# Altium PCB AuxPDU_PatricksDesign.PcbDoc
Units mm, origin at the board's own origin, x right, y up, seen from the top; angles counter-clockwise.
Board outline 80 x 100 mm, 4 copper layers (Top Layer, Layer 1, Layer 2, Bottom Layer), stack 0.602 mm thick; 60 components, 27 nets, 166 pads, 228 vias.
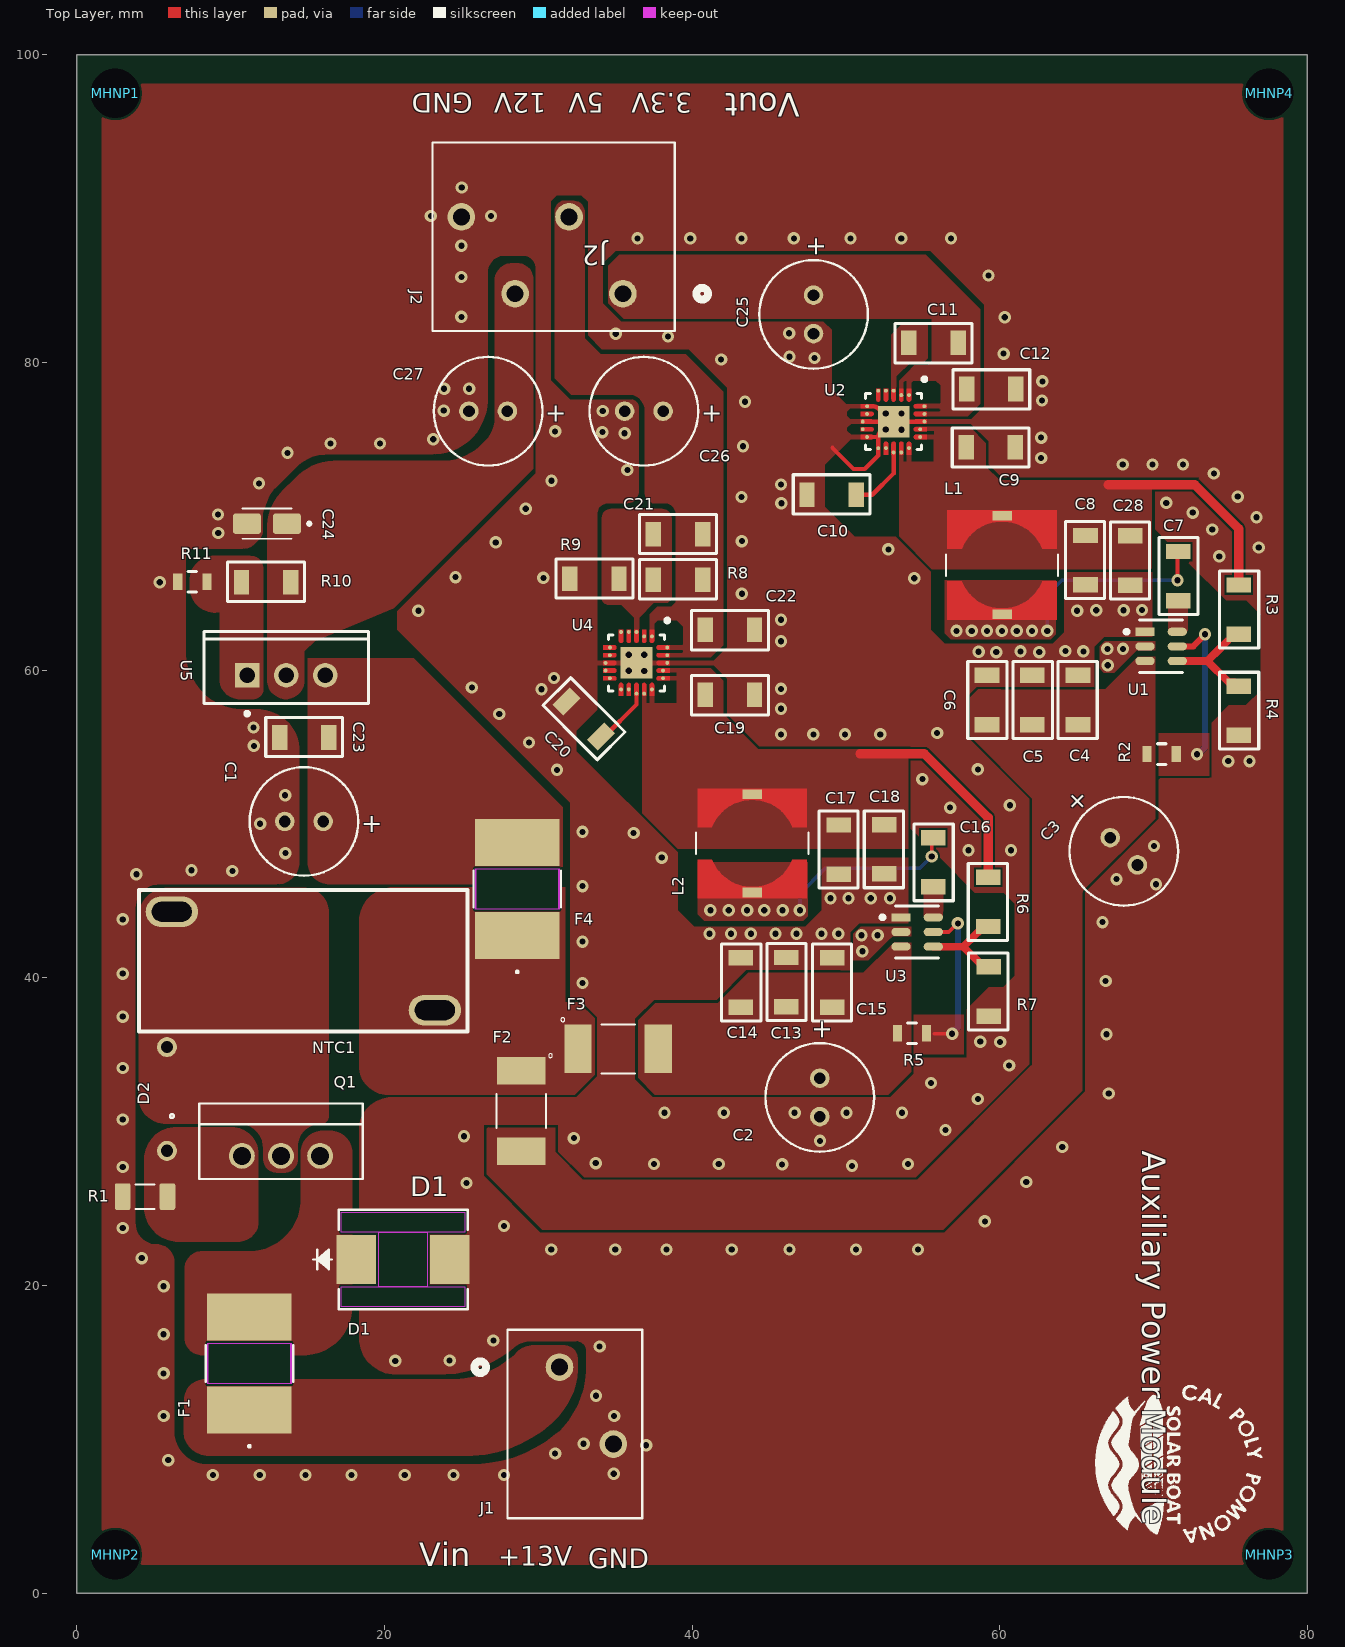
[diagram p0: Top Layer view]
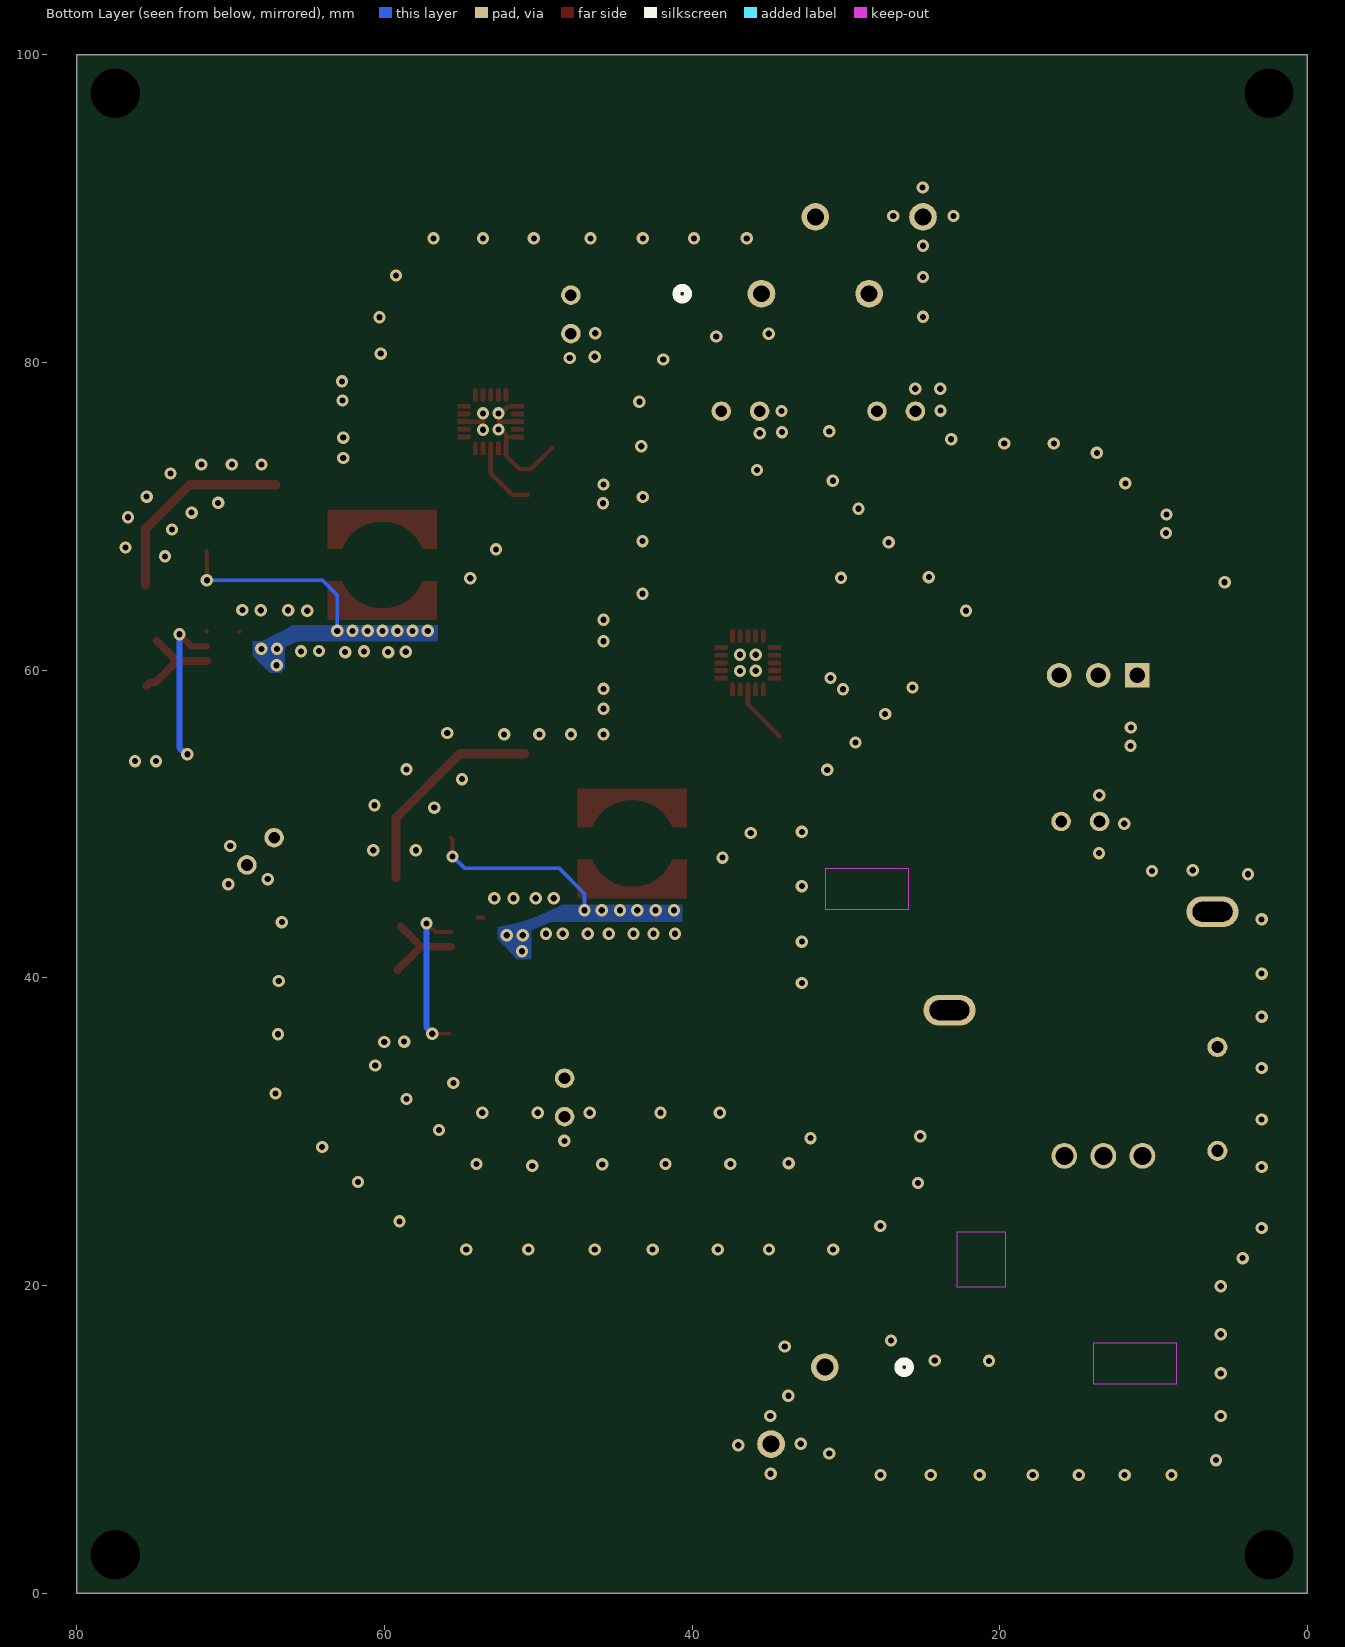
[diagram p1: Bottom Layer view, seen from below]
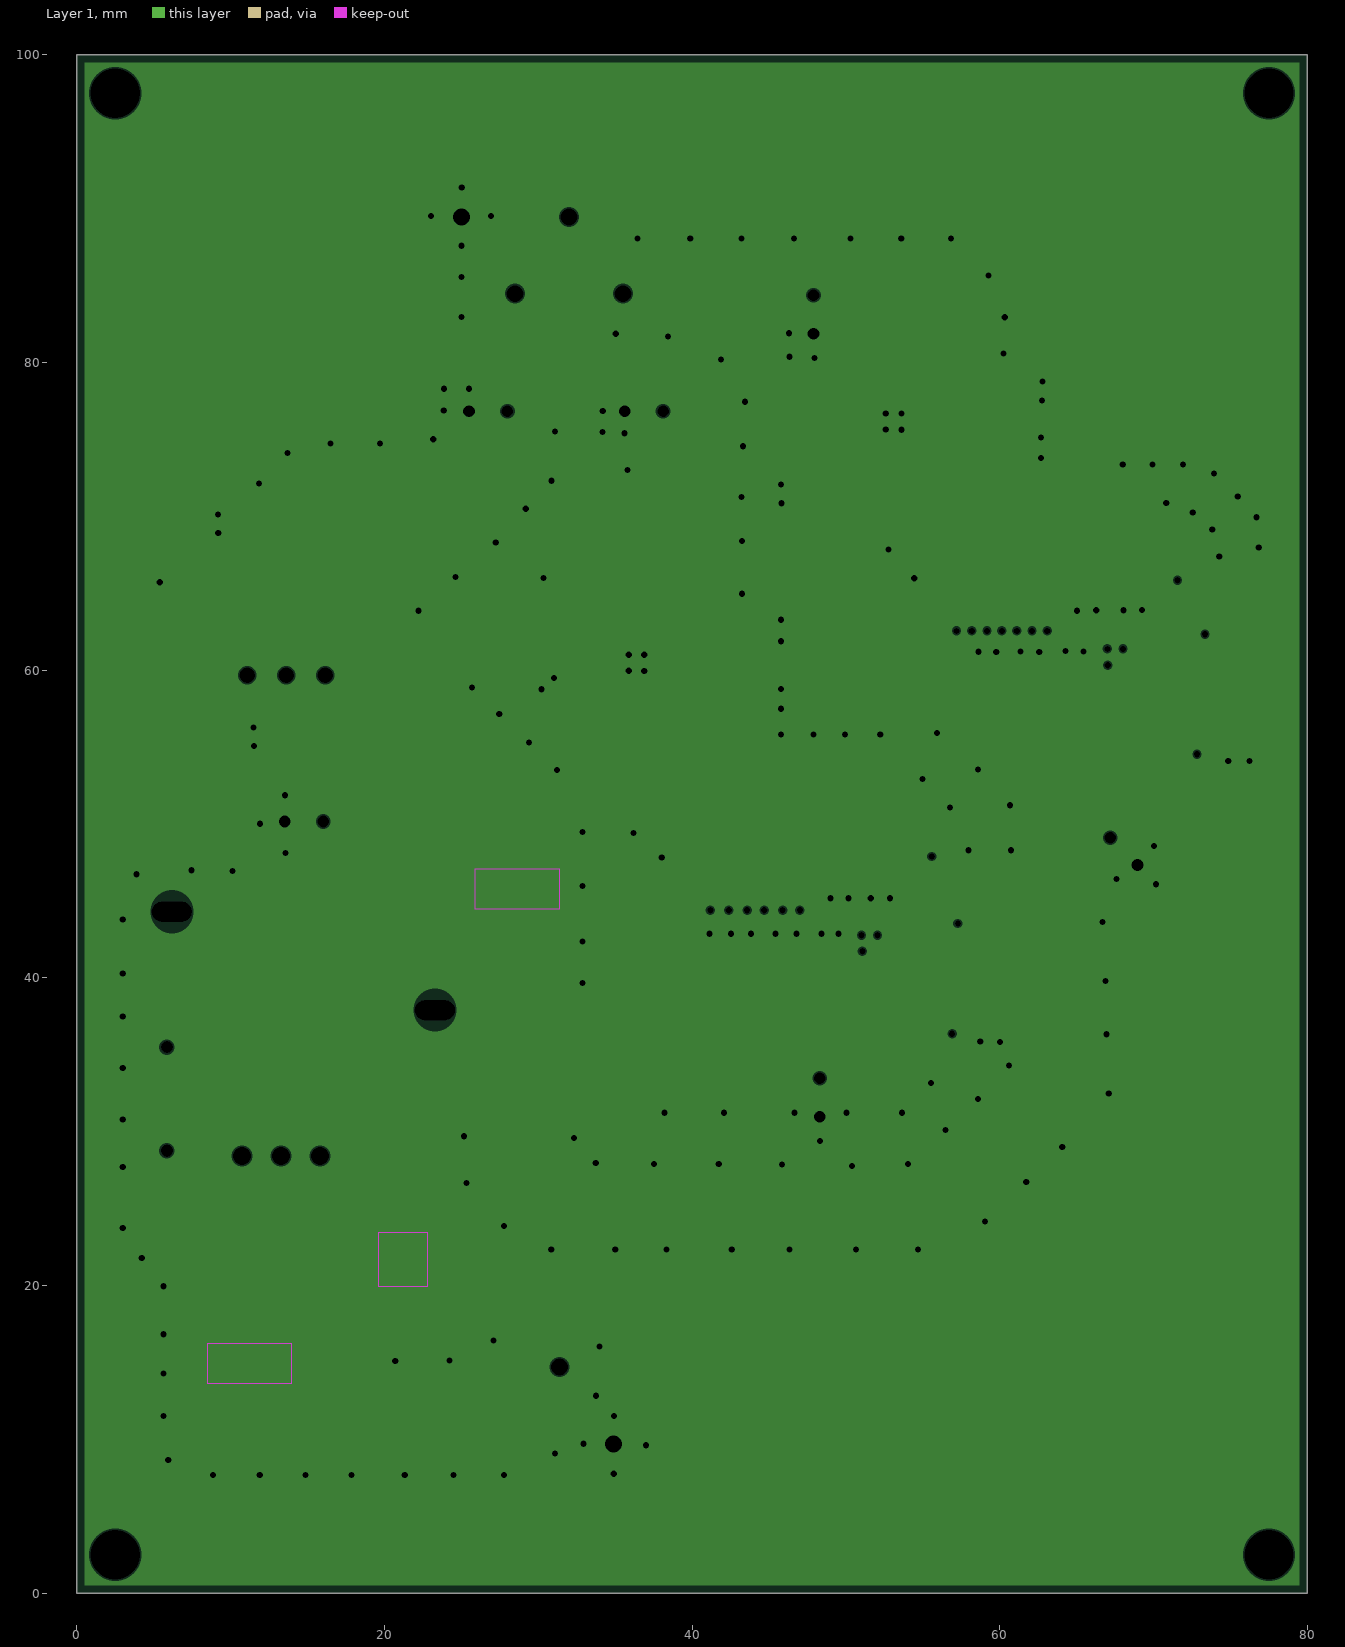
[diagram p2: Layer 1, clearances drawn from the general rule]
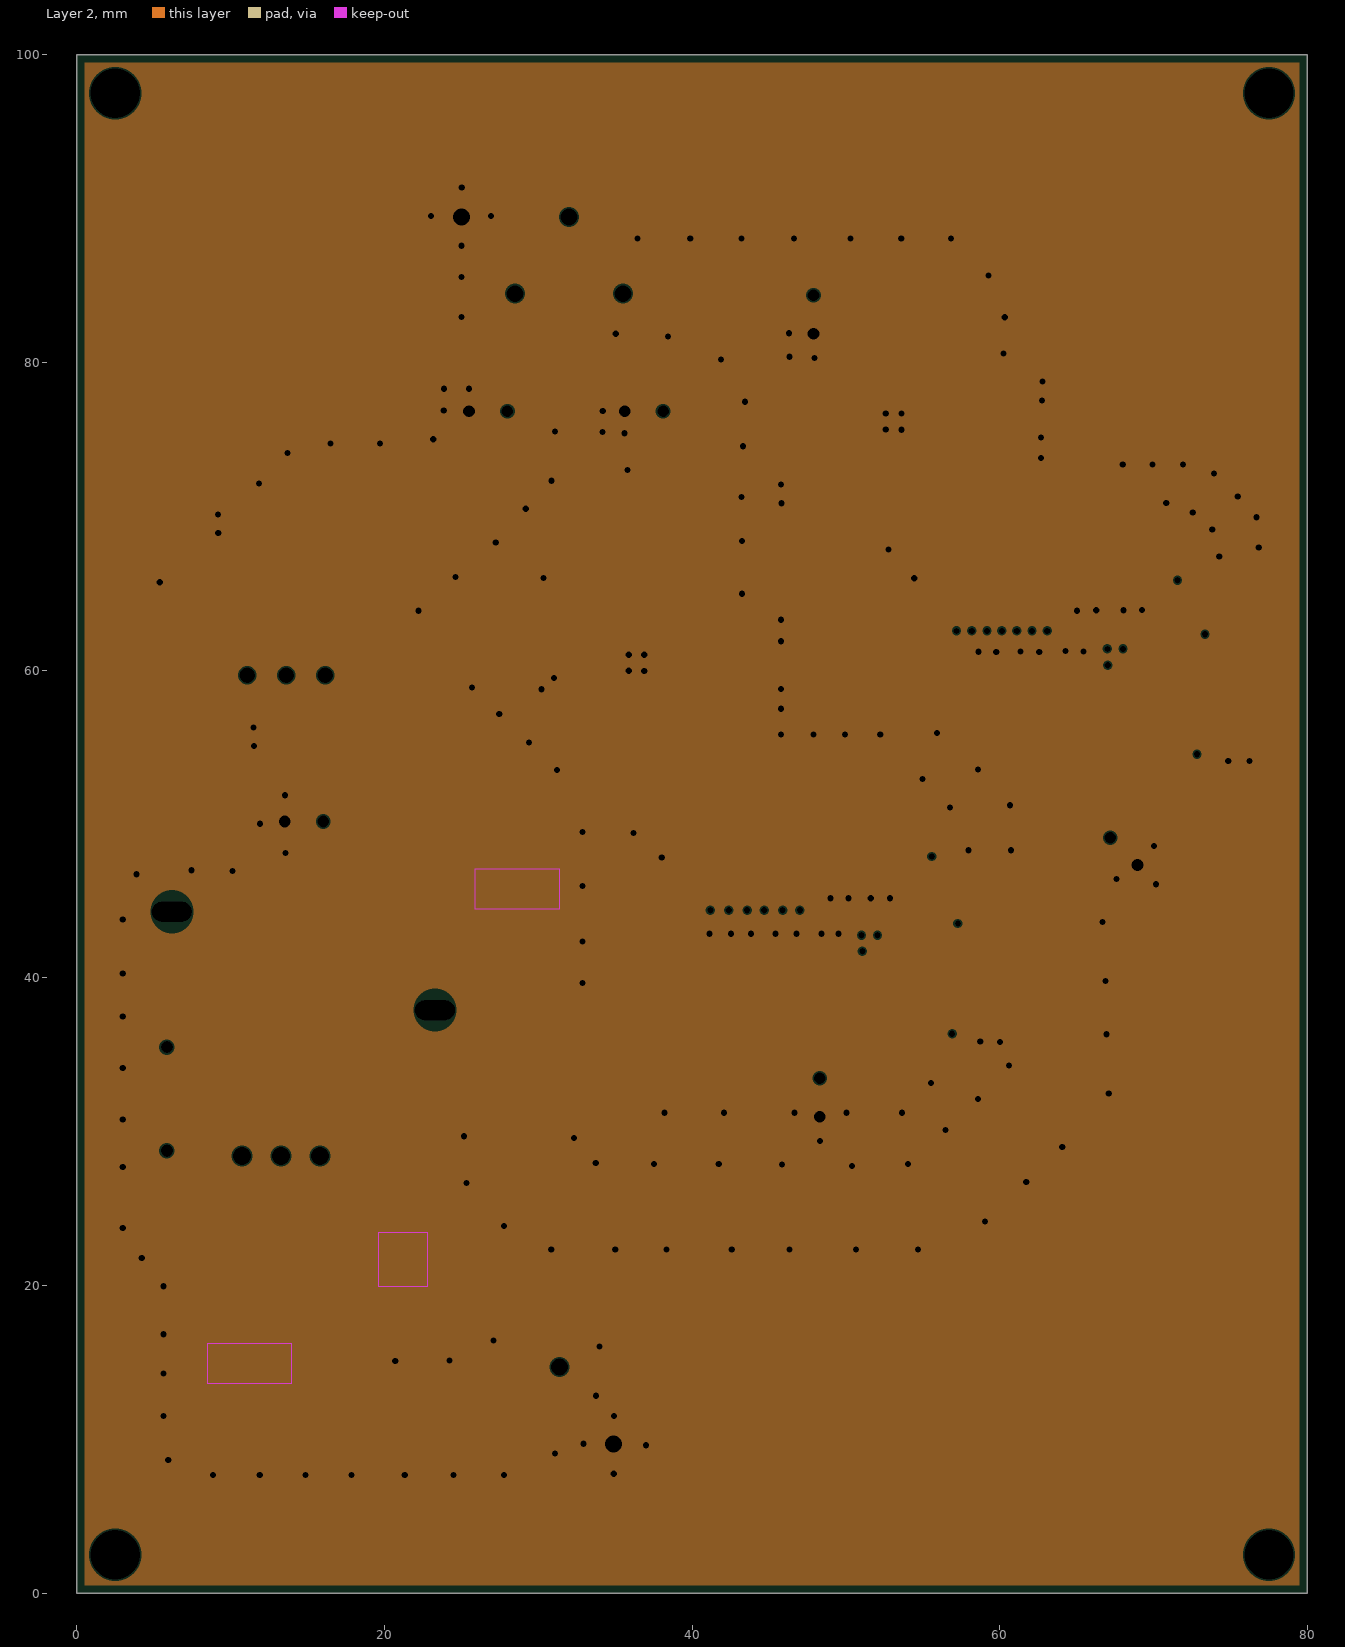
[diagram p3: Layer 2, clearances drawn from the general rule]

## Layer stack, top to bottom
Top Solder: solder mask 0.0102, Solder Resist, Dk 3.5
Top Layer: signal copper 0.035
Dielectric 2: prepreg 0.0711, PP-006, Dk 4.1
Layer 1: plane copper 0.035, net GND
Dielectric 1: dielectric 0.32, FR-4, Dk 4.8
Layer 2: plane copper 0.035, net GND
Dielectric 3: prepreg 0.0711, PP-006, Dk 4.1
Bottom Layer: signal copper 0.035
Bottom Solder: solder mask 0.0102, Solder Resist, Dk 3.5

## Board outline
0,0 0,100 80,100 80,0

## Design rules (kind name [scope] priority, off if disabled: settings)
BoardOutlineClearance [All] p1: gap=0.2 ignorepadtopadclearanceinfootprint=FALSE
Clearance [All] p1: gap=0.152 ignorepadtopadclearanceinfootprint=FALSE
ComponentClearance [All] p1: gap=0.102 collisioncheckmode=3 verticalgap=0.102 showdistances=TRUE
DiffPairsRouting [All] p1: maxlimit=0.102 minlimit=0.102 mostfreqgap=0.102 toplayer_minwidth=0.102 toplayer_maxwidth=1816.048 toplayer_prefwidth=0.102 bottomlayer_minwidth=0.102 bottomlayer_maxwidth=1816.048 bottomlayer_prefwidth=0.102 maxuncoupledlength=12.7
Height [All] p1: minheight=0 maxheight=1816.048 prefheight=12.7
HoleSize [All] p1: absolutevalues=TRUE maxlimit=6.3 minlimit=0.2 maxpercent=80.000 minpercent=20.000
HoleToHoleClearance [All] p1: gap=0.25 allowstackedmicrovias=FALSE
MinimumAnnularRing [All] p1: minimumring=0.076
MinimumSolderMaskSliver [All] p1: minsoldermaskwidth=0
PlaneClearance [All] p1: clearance=0.102
PlaneConnect PlaneConnectPowerPads [InPadClass('PowerPads')] p1: planeconnectstyle=Direct reliefexpansion=0.508 reliefentries=4 reliefconductorwidth=0.254 reliefairgap=0.254
PlaneConnect [All] p2: pad.planeconnectstyle=Relief pad.reliefexpansion=0.3 pad.reliefentries=4 pad.reliefconductorwidth=0.102 pad.reliefairgap=0.102 via.planeconnectstyle=Direct via.reliefexpansion=0.3 via.reliefentries=4 via.reliefconductorwidth=0.127 via.reliefairgap=0.127
PolygonConnect PolygonConnectPowerPads [All vs (InPadClass('PowerPads'))] p1: connectstyle=Direct reliefconductorwidth=0.254 reliefentries=4 polygonreliefangle="90 Angle" airgapwidth=0.254
PolygonConnect [All] p2: connectstyle=Direct reliefconductorwidth=0.102 reliefentries=4 polygonreliefangle="90 Angle" airgapwidth=0.102
RoutingVias [All] p1: holewidth=0.2 width=0.45 viastyle="Through Hole" minholewidth=0.2 minwidth=0.45 maxholewidth=6.3 maxwidth=6.55
SilkToSilkClearance [All] p1: silktosilkclearance=0
SilkToSolderMaskClearance [IsPad] p1: minsilkscreentomaskgap=0.102 clearancetoexposedcopper=TRUE
SolderMaskExpansion [All] p1: expansion=0.075 istentingtop=FALSE
SupplyNets "Schematic Supply Nets_7" [InNet('12to3.3Vin')] p1: voltage=0.000
SupplyNets "Schematic Supply Nets_6" [InNet('GND')] p2: voltage=0.000
SupplyNets "Schematic Supply Nets_5" [InNet('3.3Vout')] p3: voltage=0.000
SupplyNets "Schematic Supply Nets_4" [InNet('5Vout')] p4: voltage=0.000
SupplyNets "Schematic Supply Nets_3" [InNet('12to5Vin')] p5: voltage=0.000
SupplyNets "Schematic Supply Nets_2" [InNet('Vin')] p6: voltage=0.000
SupplyNets "Schematic Supply Nets_1" [InNet('12Vout')] p7: voltage=0.000
SupplyNets "Schematic Supply Nets" [InNet('12to12Vin')] p8: voltage=0.000
Width [All] p1: maxlimit=1816.048 minlimit=0.152 preferedwidth=0.152
20 further rules are at their usual default settings.

## Components (designator, comment, footprint, x,y, rotation, side; value= is the part's Value field where it differs from the comment)
C1 "100 uF" CAP_YX_6P3X11_RUB 13.513,50.165 r0 top
C2 "100 uF" CAP_YX_6P3X11_RUB 48.296,30.973 r90 top
C3 "100 uF" CAP_YX_6P3X11_RUB 68.946,47.341 r135 top
C4 "100 nF" "CAP 1206" 65.085,61.667 r270 top
C5 "10 uF" "CAP 1206" 62.113,54.453 r90 top
C6 "10 uF" "CAP 1206" 59.167,54.453 r90 top
C7 "100 nF" "CAP 1206" 71.588,62.505 r90 top
C8 "22 uF" "CAP 1206" 65.568,70.761 r270 top
C9 "10 uF" "CAP 1206" 55.799,74.503 r0 top
C10 "10nF" "CAP 1206" 52.675,71.404 r180 top
C11 "10nF" "CAP 1206" 52.08,81.276 r0 top
C12 "47uF" "CAP 1206" 55.839,78.279 r0 top
C13 "10uF" "CAP 1206" 46.111,36.115 r90 top
C14 "10 uF" "CAP 1206" 43.165,36.089 r90 top
C15 "100 nF" "CAP 1206" 49.109,43.303 r270 top
C16 "100nF" "CAP 1206" 55.674,43.902 r90 top
C17 "22uF" "CAP 1206" 49.54,51.939 r270 top
C18 "22uF" "CAP 1206" 52.487,51.964 r270 top
C19 "10 uF" "CAP 1206" 38.848,58.398 r0 top
C20 "10nF" "CAP 1206" 35.499,54.279 r135 top
C21 "10nF" "CAP 1206" 42.682,68.834 r180 top
C22 "47uF" "CAP 1206" 38.848,62.623 r0 top
C23 "10 uF" "CAP 1206" 18.387,55.625 r180 top
C24 "10 uF Tantalum" CAPMP3216X180N 12.355,69.523 r180 top
C25 "100 uF" CAP_YX_6P3X11_RUB 47.889,81.878 r90 top
C26 "100 uF" CAP_YX_6P3X11_RUB 35.61,76.835 r0 top
C27 "100 uF" CAP_YX_6P3X11_RUB 25.487,76.835 r0 top
C28 "22 uF" "CAP 1206" 68.489,70.735 r270 top
D1 "TVS DIODE 14VWM 23.2VC DO214AB" SMCJSERIES_LTF-M 21.209,21.692 r0 top
D2 "DIODE ZENER 10V 500MW DO35" BZX79C10 5.855,28.748 r90 top
F1 "" CHIP_2920L_7P98X5P44_LTF-M 11.212,14.931 r90 top
F2 "1812L110/33MR" 1812L110_33MR 28.89,31.339 r270 top
F3 "1812L110/33MR" 1812L110_33MR 35.189,35.378 r0 top
F4 "" CHIP_2920L_7P98X5P44_LTF-M 28.626,45.771 r90 top
J1 "250-202" CONN2_250-202_WAG 31.374,14.688 r0 top
J2 "250-204" CONN4_250-204_WAG 35.495,84.473 r180 top
L1 "3.3 uH" IND_MSS7341-332NLD 60.145,66.836 r180 top
L2 "3.3uH" IND_MSS7341-332NLD 43.902,48.738 r180 top
MHNP1 "Mounting Hole Non-Plated 3.2 mm" MTHNP3P2MM#1 0.214,90.551 r90 top locked
MHNP2 "Mounting Hole Non-Plated 3.2 mm" MTHNP3P2MM#2 2.5,5 r90 top
MHNP3 "Mounting Hole Non-Plated 3.2 mm" MTHNP3P2MM#2 77.5,5 r90 top
MHNP4 "Mounting Hole Non-Plated 3.2 mm" MTHNP3P2MM#3 125.507,89.933 r90 top
NTC1 "ICL 20 OHM 25% 10A 29MM" AS3220010 6.172,44.298 r0 top
Q1 "MOSFET P-CH 50V 9.7A TO220AB" IRF9Z20PBF 10.73,28.423 r0 top
R1 "100k" RESC3116X65N 4.43,25.777 r0 top
R2 "8.6kΩ ±0.25%" FP-RK73G2A-MFG 70.513,54.544 r0 top
R3 "33.2k" "CAP 1206" 75.532,60.331 r90 top
R4 "9k" "CAP 1206" 75.532,53.756 r90 top
R5 "8.6kΩ ±0.25%" FP-RK73G2A-MFG 54.29,36.394 r0 top
R6 "54.9k" "CAP 1206" 59.249,48.545 r270 top
R7 "9k" "CAP 1206" 59.274,42.72 r270 top
R8 "12.4k" "CAP 1206" 42.682,65.887 r180 top
R9 "2.37k" "CAP 1206" 37.247,65.938 r180 top
R10 "1k" "CAP 1206" 15.912,65.723 r180 top
R11 "8.6kΩ ±0.25%" FP-RK73G2A-MFG 7.505,65.748 r180 top
U1 "TPS562208" TPS562208 65.917,61.041 r0 top
U2 "TPS7A8400ARGRT" TPS7A8400ARGRT 53.096,79.97 r270 top
U3 "TPS562208" TPS562208 50.052,42.472 r0 top
U4 "TPS7A8400ARGRT" TPS7A8400ARGRT 36.38,64.284 r270 top
U5 "LM1084IT-ADJ/NOPB" NDE0003A 13.605,59.673 r0 top

## Footprints (in the part's own frame and the unit in brackets; to place one, negate y for a bottom-side part, rotate by r counter-clockwise, add the part's x,y. Pads: shape width x height; smd on the part's side, far side on the other; paste and mask are expansions set on the pad)
1812L110_33MR [mm] "PTC Reset Fuse"
  rect 1.78x3.15 smd: 1(-2.615,0) 2(2.615,0)
  silkscreen extent -3.73,-1.6 1.1,2.03
AS3220010 [mm] "Inrush Current Limiter 20 Ohms ±25% 10 A 1.142\" (29.00mm)"
  oval 3.4x2 hole 1.3 slot 2.6 at 0 deg: 1(0,0) 2(17.1,-6.4)
  silkscreen extent -2.12,-7.8 19.23,1.4
BZX79C10 [mm] "2 Hole, Lead Diameter 0.46-0.533 mm"
  round 1.3 hole 0.8: 1(0,0) 2(6.75,0)
"CAP 1206" [mm] "Generic SMD capacitor with 1206 package (3216 metric)"
  rect 1x1.6 smd: 1(2.007,0) 2(5.207,0)
  silkscreen extent 1.11,-1.3 6.11,1.25
CAP_YX_6P3X11_RUB [mil]
  round 50 / inner round 60 / far side round 50 hole 30 paste-99999 mask+0: 1(0,0) 2(98.43,0)
  silkscreen extent -90,-139 188,139, body extent -85,-134 184,134, height 493
CAPMP3216X180N [mm]
  rrect25% 1.81x1.32 smd: 1(-1.3,0) 2(1.3,0)
  silkscreen extent -2.85,-0.98 1.6,0.98, body extent -1.6,-0.8 1.6,0.8, height 1.8
CHIP_2920L_7P98X5P44_LTF-M [mil]
  rect 120x216 smd paste+0 mask+0: 1(-119,0) 2(119,0)
  Top Layer keep-out region: -52.17,-105 -52.17,105 52.17,105 52.17,-105
  Keep-Out Layer region: -52.17,-107 -52.17,107 52.17,107 52.17,-107
  silkscreen extent -215,-112 47,112, body extent -157,-107 157,107, height 49
CONN2_250-202_WAG [mm]
  round 1.8 / inner round 1.524 / far side round 1.8 hole 1.1 paste-2539.97 mask+0: 1(0,0) 2(3.5,-5)
  silkscreen extent -5.53,-9.83 5.38,2.43, body extent -3.26,-9.69 5.24,2.31, height 12.81
CONN4_250-204_WAG [mm]
  round 1.8 hole 1.1 paste-2539.97 mask+0: 1(0,0) 2(3.5,-5) 3(7,0) 4(10.5,-5)
  silkscreen extent -5.54,-9.83 12.38,2.43, body extent -3.26,-9.68 12.24,2.32, height 12.81
FP-RK73G2A-MFG [mm]
  rect 0.6x1.05 smd paste+0 mask+0: 1(-0.95,0) 2(0.95,0)
  silkscreen extent -0.28,-0.67 0.28,0.68, body extent -1.35,-0.78 1.35,0.77, height 0.25
IND_MSS7341-332NLD [mm]
  rect 1.27x0.635 smd paste-2 mask+0: 1(0,3.2) 2(0,-3.2)
  Top Layer region: 3.55,-3.55 -3.55,-3.55 -3.55,-1.05 -2.62,-1.05 -2.57,-1.169 -2.522,-1.269 -2.47,-1.368 -2.415,-1.464 -2.356,-1.558 -2.293,-1.65 -2.226,-1.739 -2.156,-1.826 -2.083,-1.909 -2.006,-1.99 -1.926,-2.067 -1.844,-2.142 -1.758,-2.213 -1.67,-2.28 -1.579,-2.344 -1.485,-2.405 -1.39,-2.461 -1.292,-2.514 -1.192,-2.563 -1.09,-2.608 -0.987,-2.649 -0.882,-2.685 -0.775,-2.718 -0.668,-2.746 -0.559,-2.77 -0.45,-2.79 -0.339,-2.805 -0.229,-2.816 -0.118,-2.823 0,-2.825 0.118,-2.823 0.229,-2.816 0.339,-2.805 0.45,-2.79 0.559,-2.77 0.668,-2.746 0.775,-2.718 0.882,-2.685 0.987,-2.649 1.09,-2.608 1.192,-2.563 1.292,-2.514 1.39,-2.461 1.485,-2.405 1.579,-2.344 1.67,-2.28 1.758,-2.213 1.844,-2.142 1.926,-2.067 2.006,-1.99 2.083,-1.909 2.156,-1.826 2.226,-1.739 2.293,-1.65 2.356,-1.558 2.415,-1.464 2.47,-1.368 2.522,-1.269 2.57,-1.169 2.62,-1.05 3.55,-1.05
  Top Layer region: 3.55,1.05 2.62,1.05 2.57,1.169 2.522,1.269 2.47,1.368 2.415,1.464 2.356,1.558 2.293,1.65 2.226,1.739 2.156,1.826 2.083,1.909 2.006,1.99 1.926,2.067 1.844,2.142 1.758,2.213 1.67,2.28 1.579,2.344 1.485,2.405 1.39,2.461 1.292,2.514 1.192,2.563 1.09,2.608 0.987,2.649 0.882,2.685 0.775,2.718 0.668,2.746 0.559,2.77 0.45,2.79 0.339,2.805 0.229,2.816 0.118,2.823 0,2.825 -0.118,2.823 -0.229,2.816 -0.339,2.805 -0.45,2.79 -0.559,2.77 -0.668,2.746 -0.775,2.718 -0.882,2.685 -0.987,2.649 -1.09,2.608 -1.192,2.563 -1.292,2.514 -1.39,2.461 -1.485,2.405 -1.579,2.344 -1.67,2.28 -1.758,2.213 -1.844,2.142 -1.926,2.067 -2.006,1.99 -2.083,1.909 -2.156,1.826 -2.226,1.739 -2.293,1.65 -2.356,1.558 -2.415,1.464 -2.47,1.368 -2.522,1.269 -2.57,1.169 -2.62,1.05 -3.55,1.05 -3.55,3.55 3.55,3.55
  silkscreen extent -3.65,-0.7 3.65,0.7, body extent -3.65,-3.65 3.65,3.65, height 4.1
IRF9Z20PBF [mil] "TO-220AB_HIGHVOLTAGE_VIS"
  round 66 hole 46 paste-99999 mask+0: D(100,0) G(0,0) S(200,0)
  silkscreen extent -184,-59 309,134, body extent -104,-54 304,129, height 640
MTHNP3P2MM#1 [mm] "Mounting Hole Non Plated 3.2 mm hole"
  round 1 hole 3.2 unplated: ""(6.949,-2.286)
MTHNP3P2MM#2 [mm] "Mounting Hole Non Plated 3.2 mm hole"
  round 1 hole 3.2 unplated: ""(-2.5,0)
MTHNP3P2MM#3 [mm] "Mounting Hole Non Plated 3.2 mm hole"
  round 1 hole 3.2 unplated: ""(7.567,48.007)
NDE0003A [mm] "FM, 3-Leads, Body 10.7x4.7mm, Pitch 2.54mm"
  rect 1.6x1.6 hole 1: 1(-2.54,0)
  round 1.6 hole 1: 2(0,0) 3(2.54,0)
  silkscreen extent -5.35,-2.62 5.35,2.85, body extent -5.4,-1.9 5.4,2.9, height 19.4
RESC3116X65N [mm]
  rrect25% 1.02x1.73 smd: 1(-1.455,0) 2(1.455,0)
  silkscreen extent -0.63,-0.8 0.63,0.8
SMCJSERIES_LTF-M [mil]
  rect 101x126 smd paste+0 mask+0: 1(-119.5,0) 2(119.5,0)
  Top Layer keep-out region: -158,-120.5 -158,-69.88 158,-69.88 158,-120.5
  Top Layer keep-out region: -158,69.88 -158,120.5 158,120.5 158,69.88
  Top Layer keep-out region: -62.99,-69.88 -62.99,69.88 62.01,69.88 62.01,-69.88
  Keep-Out Layer region: -62.99,-69.88 -62.99,69.88 62.01,69.88 62.01,-69.88
  silkscreen extent -230,-128 165,128, body extent -160,-123 160,123, height 105
TPS7A8400ARGRT [mm] "Linear Voltage Regulator IC Positive Adjustable/Programmable 1 Output 3A"
  round 0.252 smd paste-1000 mask+0: 1(2.085,1) 2(2.085,0.5) 3(1.8,0) 4(1.8,-0.5) 5(1.8,-1) 6(2.81,-1.725) 7(3.31,-1.725) 8(3.81,-2.01) 9(4.31,-2.01) 10(4.81,-1.725) 11(5.535,-1) 12(5.535,-0.5) 13(5.81,0) 14(5.81,0.5) 15(5.535,1) 16(4.81,1.725) 17(4.31,1.725) 18(3.81,2) 19(3.31,2) 20(2.81,2)
  rect 2.05x2.05 smd paste-1000 mask+0: 21(3.81,0)
  Top Layer region: 3.95,2.15 3.95,1.44 3.939,1.386 3.909,1.341 3.864,1.311 3.81,1.3 3.81,1.3 3.756,1.311 3.711,1.341 3.681,1.386 3.67,1.44 3.67,1.44 3.67,2.15
  Top Layer region: 2.67,-2.15 2.67,-1.44 2.681,-1.386 2.711,-1.341 2.756,-1.311 2.81,-1.3 2.81,-1.3 2.864,-1.311 2.909,-1.341 2.939,-1.386 2.95,-1.44 2.95,-1.44 2.95,-2.15
  Top Layer region: 3.67,-2.15 3.67,-1.44 3.681,-1.386 3.711,-1.341 3.756,-1.311 3.81,-1.3 3.81,-1.3 3.864,-1.311 3.909,-1.341 3.939,-1.386 3.95,-1.44 3.95,-1.44 3.95,-2.15
  Top Layer region: 4.67,-2.15 4.67,-1.44 4.681,-1.386 4.711,-1.341 4.756,-1.311 4.81,-1.3 4.81,-1.3 4.864,-1.311 4.909,-1.341 4.939,-1.386 4.95,-1.44 4.95,-1.44 4.95,-2.15
  Top Layer region: 5.96,-1.14 5.25,-1.14 5.196,-1.129 5.151,-1.099 5.121,-1.054 5.11,-1 5.11,-1 5.121,-0.946 5.151,-0.901 5.196,-0.871 5.25,-0.86 5.25,-0.86 5.96,-0.86
  Top Layer region: 1.66,1.14 2.37,1.14 2.424,1.129 2.469,1.099 2.499,1.054 2.51,1 2.51,1 2.499,0.946 2.469,0.901 2.424,0.871 2.37,0.86 2.37,0.86 1.66,0.86
  Top Layer region: 1.66,0.64 2.37,0.64 2.424,0.629 2.469,0.599 2.499,0.554 2.51,0.5 2.51,0.5 2.499,0.446 2.469,0.401 2.424,0.371 2.37,0.36 2.37,0.36 1.66,0.36
  Top Layer region: 1.66,0.14 2.37,0.14 2.424,0.129 2.469,0.099 2.499,0.054 2.51,0 2.51,0 2.499,-0.054 2.469,-0.099 2.424,-0.129 2.37,-0.14 2.37,-0.14 1.66,-0.14
  Top Layer region: 1.66,-0.36 2.37,-0.36 2.424,-0.371 2.469,-0.401 2.499,-0.446 2.51,-0.5 2.51,-0.5 2.499,-0.554 2.469,-0.599 2.424,-0.629 2.37,-0.64 2.37,-0.64 1.66,-0.64
  Top Layer region: 1.66,-0.86 2.37,-0.86 2.424,-0.871 2.469,-0.901 2.499,-0.946 2.51,-1 2.51,-1 2.499,-1.054 2.469,-1.099 2.424,-1.129 2.37,-1.14 2.37,-1.14 1.66,-1.14
  Top Layer region: 3.17,-2.15 3.17,-1.44 3.181,-1.386 3.211,-1.341 3.256,-1.311 3.31,-1.3 3.31,-1.3 3.364,-1.311 3.409,-1.341 3.439,-1.386 3.45,-1.44 3.45,-1.44 3.45,-2.15
  Top Layer region: 4.17,-2.15 4.17,-1.44 4.181,-1.386 4.211,-1.341 4.256,-1.311 4.31,-1.3 4.31,-1.3 4.364,-1.311 4.409,-1.341 4.439,-1.386 4.45,-1.44 4.45,-1.44 4.45,-2.15
  Top Layer region: 5.96,-0.64 5.25,-0.64 5.196,-0.629 5.151,-0.599 5.121,-0.554 5.11,-0.5 5.11,-0.5 5.121,-0.446 5.151,-0.401 5.196,-0.371 5.25,-0.36 5.25,-0.36 5.96,-0.36
  Top Layer region: 5.96,-0.14 5.25,-0.14 5.196,-0.129 5.151,-0.099 5.121,-0.054 5.11,0 5.11,0 5.121,0.054 5.151,0.099 5.196,0.129 5.25,0.14 5.25,0.14 5.96,0.14
  Top Layer region: 3.45,2.15 3.45,1.44 3.439,1.386 3.409,1.341 3.364,1.311 3.31,1.3 3.31,1.3 3.256,1.311 3.211,1.341 3.181,1.386 3.17,1.44 3.17,1.44 3.17,2.15
  Top Layer region: 2.95,2.15 2.95,1.44 2.939,1.386 2.909,1.341 2.864,1.311 2.81,1.3 2.81,1.3 2.756,1.311 2.711,1.341 2.681,1.386 2.67,1.44 2.67,1.44 2.67,2.15
  Top Layer region: 5.96,0.36 5.25,0.36 5.196,0.371 5.151,0.401 5.121,0.446 5.11,0.5 5.11,0.5 5.121,0.554 5.151,0.599 5.196,0.629 5.25,0.64 5.25,0.64 5.96,0.64
  Top Layer region: 5.96,0.86 5.25,0.86 5.196,0.871 5.151,0.901 5.121,0.946 5.11,1 5.11,1 5.121,1.054 5.151,1.099 5.196,1.129 5.25,1.14 5.25,1.14 5.96,1.14
  Top Layer region: 4.95,2.15 4.95,1.44 4.939,1.386 4.909,1.341 4.864,1.311 4.81,1.3 4.81,1.3 4.756,1.311 4.711,1.341 4.681,1.386 4.67,1.44 4.67,1.44 4.67,2.15
  Top Layer region: 4.45,2.15 4.45,1.44 4.439,1.386 4.409,1.341 4.364,1.311 4.31,1.3 4.31,1.3 4.256,1.311 4.211,1.341 4.181,1.386 4.17,1.44 4.17,1.44 4.17,2.15
  silkscreen extent 0.93,-1.83 5.64,2.12, body extent 1.56,-2.25 6.06,2.25, height 0.25
TPS562208 [mil] "Buck Switching Regulator IC Positive Adjustable 0.768V 1 Output 2A SOT-23-6 Thin, TSOT-23-6"
  rect 49.39x20.95 smd paste+0 mask+0: 1(138.65,57.4)
  rrect100% 49.39x20.95 smd paste+0 mask+0: 2(138.65,20) 3(138.65,-17.4) 4(221.35,-17.4) 5(221.35,20) 6(221.35,57.4)
  silkscreen extent 87,-47 235,87, body extent 110,-41 250,81, height 10

## Part data
C1 C2 C3 C25 C26 C27: library part 35ZLH100MEFC6.3X11, "100 uF electrolytic capacitor", Manufacturer_Name=Rubycon, Copyright="Copyright (C) 2025 Ultra Librarian. All rights reserved.", Manufacturer_Part_Number=35ZLH100MEFC6.3X11
C4 C5 C6 C7 C8 C9 C10 C11 C12 C13 C14 C15 C16 C17 C18 C19 C20 C21 C22 C23 C28: library part "Cap 1206", "Generic SMD capacitor with 1206 package (3216 metric)"
C24: library part TAJA106K016RNJ, "10 ÂµF Molded Tantalum Capacitors 16 V 1206 (3216 Metric) 3Ohm", Package="1206 AVX", Check_prices=https://www.snapeda.com/parts/TAJA106K016RNJ/Kyocera/view-part/?ref=eda, MF="KYOCERA AVX", MP=TAJA106K016RNJ, SnapEDA_Link=https://www.snapeda.com/parts/TAJA106K016RNJ/Kyocera/view-part/?ref=snap
D1: library part SMCJ14A, "Unidirectional"
D2: library part BZX79C10, Supplier Part Number 1=BZX79C10-ND, ComponentLink1Description="New link", Supplier 1=DigiKey
F1 F4: library part 2920L150DR, "Description", Manufacturer_Name="Littelfuse Inc", Copyright="Copyright (C) 2025 Ultra Librarian. All rights reserved.", Manufacturer_Part_Number=2920L150DR, RefDes=RefDes, Type=Type
F2 F3: Package=None, Availability=Unavailable, MF="{'manufacturer': u'Littelfuse Inc.'}", MP=1812L110/33MR, Price=None
J1 J2: "Description", Manufacturer_Name=Wago, Copyright="Copyright (C) 2025 Ultra Librarian. All rights reserved.", RefDes=RefDes, Type=Type
  J1: Manufacturer_Part_Number=250-202
  J2: Manufacturer_Part_Number=250-204
L1 L2: library part MSS7341-332NLD, "3.3 ÂµH Shielded Drum Core Inductor 3.95 A 18mOhm Max Nonstandard", Package=None, Check_prices=https://www.snapeda.com/parts/MSS7341-332NLD/Coilcraft/view-part/?ref=eda, MF=Coilcraft, MP=MSS7341-332NLD, SnapEDA_Link=https://www.snapeda.com/parts/MSS7341-332NLD/Coilcraft/view-part/?ref=snap
MHNP1 MHNP2 MHNP3 MHNP4: library part MTHNP3P2MM
NTC1: library part AS3220010, Supplier Part Number 1=570-AS3220010-ND, Supplier 1=DigiKey
Q1: library part IRF9Z20PBF, ComponentLink1Description="New link", Supplier 1=Newark, Supplier 2=DigiKey, Supplier Part Number 1=IRF9Z20PBF, Supplier Part Number 2=IRF9Z20PBF-ND
R1: library part RC1206FR-10100KL, Package=None, Availability=Unavailable, MF="{'manufacturer': u'YAGEO'}", MP=RC1206FR-10100KL, Price=None
R2 R5 R11: library part CMP-04015-106177-1, "8.06kΩ ±0.25% 0.125W Chip Resistor 0805 Thick Film AEC-Q200 Qualified", RoHS Compliant=Yes
R3 R4 R6 R7 R8 R9 R10: library part "Res 1206", "Generic SMD resistor with 1206 package (3216 metric)"
U1 U3: "Buck Switching Regulator IC Positive Adjustable 0.768V 1 Output 2A SOT-23-6 Thin, TSOT-23-6"
U2 U4: "Linear Voltage Regulator IC Positive Adjustable/Programmable 1 Output 3A"
U5: library part CMP-0062-02529-3, "5A Low Dropout Positive Regulators, 3-pin TO-220, Pb-Free", Manufacturer="Texas Instruments", PackageTopMarking=NSUZXYTTE#*LM1084*IT-ADJ, PowerWise=N, ComponentLink1Description="Datasheet URL", ComponentLink1URL=http://www.ti.com/general/docs/lit/getliterature.tsp?genericPartNumber=LM1084&fileType=pdf, CompType="LDO IC", PackageDescription="TO-220, Molded, 3 Lead, Straight", PackageReference=NDE0003A, PinCount=3, RoHS=Y

## Via types
v1: diameter 0.8, hole 0.4, Top Layer to Bottom Layer, tented top, 220 vias
v2: diameter 0.8, hole 0.4, Top Layer to Bottom Layer, 8 vias

## Nets (pads, with @x,y where several pads share a name; then routed paths per layer and width w, separated by ;. In a path a pad name is that pad's centre, name@x,y a point inside that pad or via, vN(x,y) a via of type N, cw(c..) or ccw(c..) an arc to the next point about the centre after c; other vN are vias at no path point)
3.3Vout: C11.2 C12.1 C25.2 J2.1 U2.1 U2.2 U2.19 U2.20
5Vout: C21.1 C22.1 C26.2 J2.2 R8.1 U4.1 U4.19 U4.20
12to3.3Vin: C3.2 C4.2 C5.1 C6.1 F2.2 R2.1 U1.3
12to5Vin: C2.2 C13.1 C14.1 C15.2 F3.2 R5.1 U3.3
12to12Vin: C1.2 C23.1 F4.2 U5.3
12Vout: C24.1 C27.2 J2.3 R10.1 U5.2
GND: C1.1 C2.1 C3.1 C4.1 C5.2 C6.2 C8.2 C9.2 C10.2 C12.2 C13.2 C14.2 C15.1 C17.2 C18.2 C19.2 C20.2 C22.2 C23.2 C24.2 C25.1 C26.1 C27.1 C28.2 D1.2 J1.2 J2.4 R1.1 R4.1 R7.2 R9.2 R11.2 U1.1 U2.6 U2.8 U2.10 U2.11 U2.18 U2.21 U3.1 U4.8 U4.18 U4.21 | length 11.1
  Top Layer w0.254: U3.1 U3.1@53.935,43.93 ; U1.1 U1.1@69.46,62.478
  Top Layer w0.28: 49.119,74.452 50.491,73.081 51.221,73.081 52.096,73.956 U2.11 U2.21@52.096,75.16 ; U2.8 U2.21@52.596,76.16 ; U2.6 51.715,77.16 cw(c51.715,76.564) 52.211,76.893 v2(52.588,76.693) ; 51.656,75.16 U2.21@52.096,75.16 ; v2(52.588,75.652) ccw(c52.588,75.16) U2.21@52.096,75.16 ; U2.21@53.596,76.16 U2.18
  other v1: 8.839,7.682 11.887,7.682 14.859,7.682 17.856,7.682 21.311,7.682 24.486,7.682 27.762,7.682 34.9,7.758 5.944,8.647 31.09,9.079 37.008,9.612 32.944,9.714 5.639,11.517 34.925,11.517 33.747,12.826 5.639,14.286 20.701,15.098 24.232,15.124 33.985,16.038 27.076,16.419 5.639,16.826 5.639,19.95 4.216,21.779 30.836,22.337 35.001,22.337 38.329,22.337 42.57,22.337 46.33,22.337 50.648,22.337 54.686,22.337 2.981,23.734 27.768,23.865 59.03,24.166 25.324,26.655 61.722,26.732 2.981,27.697 50.394,27.773 45.847,27.875 37.516,27.9 41.732,27.9 54.026,27.9 33.731,27.951 64.058,29.004 48.311,29.399 32.309,29.576 25.172,29.7 56.464,30.11 2.981,30.796 38.202,31.227 42.062,31.227 46.66,31.227 50.038,31.227 53.645,31.227 58.572,32.116 67.082,32.483 55.524,33.158 2.981,34.14 60.604,34.301 60.02,35.825 58.725,35.85 66.929,36.333 2.981,37.476 32.868,39.66 66.878,39.787 2.981,40.27 32.868,42.353 41.123,42.861 42.52,42.861 43.815,42.861 45.415,42.861 46.787,42.861 48.412,42.861 49.505,42.861 66.675,43.623 2.981,43.802 48.997,45.172 50.165,45.172 51.613,45.172 52.857,45.172 32.868,45.959 70.155,46.086 67.589,46.417 3.865,46.735 10.109,46.95 7.455,46.998 38.024,47.814 13.553,48.108 57.963,48.296 60.731,48.296 70.028,48.576 36.195,49.414 32.868,49.49 11.913,50.013 56.769,51.065 60.655,51.217 13.538,51.867 54.966,52.919 31.217,53.518 58.572,53.554 74.854,54.087 76.225,54.087 11.506,55.078 29.388,55.296 45.771,55.829 47.879,55.829 49.936,55.829 52.222,55.829 55.923,55.916 11.481,56.272 27.457,57.15 45.771,57.491 30.201,58.761 45.771,58.786 25.679,58.877 31.013,59.498 59.766,61.174 62.56,61.174 58.623,61.199 61.341,61.225 65.43,61.225 64.262,61.25 45.771,61.885 45.771,63.282 22.2,63.866 65.024,63.866 66.269,63.892 68.047,63.892 69.24,63.917 43.231,64.973 5.385,65.721 54.432,65.975 30.328,66 24.613,66.051 74.27,67.397 52.756,67.854 76.835,67.981 27.229,68.311 43.231,68.388 9.195,68.921 73.812,69.15 76.683,69.937 9.169,70.115 72.542,70.242 29.185,70.496 45.796,70.851 70.815,70.877 43.205,71.258 75.463,71.283 45.771,72.071 11.836,72.147 30.853,72.319 73.914,72.782 35.789,73.01 67.996,73.366 69.926,73.366 71.907,73.366 62.687,73.798 13.691,74.128 43.307,74.56 16.485,74.738 19.71,74.738 23.165,75.017 62.687,75.119 35.611,75.398 34.163,75.474 31.09,75.525 34.188,76.846 23.851,76.871 43.434,77.455 62.738,77.532 23.876,78.294 25.502,78.294 62.763,78.776 41.885,80.199 47.955,80.3 46.33,80.376 60.249,80.58 38.43,81.697 35.027,81.875 46.304,81.9 60.325,82.942 24.994,82.967 24.994,85.558 59.258,85.66 24.994,87.59 36.449,88.073 39.878,88.073 43.205,88.073 46.609,88.073 50.292,88.073 53.594,88.073 56.82,88.073 23.012,89.52 26.924,89.52 25.019,91.375
  other v2: 36.888,59.94 35.872,59.966 35.872,61.007 36.888,61.007 53.604,75.626 53.604,76.693
NetC7_1: C7.1 U1.6 | length 0.1
  Top Layer w0.254: U1.6 U1.6@71.579,62.539
NetC7_2: C7.2 L1.1 U1.2 | length 13.1
  Top Layer w0.25: v1(71.552,65.848) 71.552,67.676 C7.2
  Bottom Layer w0.25: v1(63.079,62.556) 63.079,64.893 64.033,65.848 v1(71.552,65.848)
  other v1: 67.016,60.321 66.99,61.388 68.006,61.388 57.186,62.556 58.176,62.556 59.167,62.556 60.132,62.556 61.097,62.556 62.088,62.556
NetC8_1: C8.1 C9.1 C28.1 L1.2 R3.2 U2.14 U2.15 U2.16 U2.17 | length 13.3
  Top Layer w0.6: 67.054,72.056 72.665,72.056 75.532,69.188 R3.2
NetC10_1: C10.1 U2.13 | length 4.4
  Top Layer w0.28: C10.1 51.71,71.404 53.096,72.79 U2.13
NetC11_1: C11.1 U2.3
NetC16_1: C16.1 U3.6
NetC16_2: C16.2 L2.1 U3.2 | length 11.9
  Top Layer w0.25: v1(55.575,47.89) 55.575,49.01 C16.2
  Bottom Layer w0.25: v1(47,44.395) 47,45.462 48.666,47.128 54.813,47.128 v1(55.575,47.89)
  other v1: 51.064,41.728 51.014,42.769 52.055,42.769 41.184,44.395 42.378,44.395 43.571,44.395 44.689,44.395 45.883,44.395
NetC17_1: C17.1 C18.1 C19.1 L2.2 R6.1 U4.14 U4.15 U4.16 U4.17 | length 13.9
  Top Layer w0.6: 50.908,54.57 55.093,54.57 59.249,50.414 R6.1
NetC20_1: C20.1 U4.13 | length 3.6
  Top Layer w0.28: C20.1@34.323,55.709 36.38,57.766 U4.13
NetC21_2: C21.2 R8.2 R9.1 U4.3
NetD1_1: D1.1 F1.2 Q1.S
NetD2_1: D2.1 Q1.G R1.2
NetD2_2: D2.2 NTC1.1 Q1.D
NetF2_1: F2.1 F3.1 F4.1 NTC1.2
NetR2_2: R2.2 U1.5 | length 10.2
  Top Layer w0.254: v1@73.332,62.302 v1(73.332,62.338)
  Top Layer w0.4: U1.5 72.58,61.549 v1@73.332,62.302
  Bottom Layer w0.4: v1@72.858,54.492 73.332,54.966 v1(73.332,62.338)
  other v1: 72.819,54.531
NetR3_1: R3.1 R4.2 U1.4 | length 6.5
  Top Layer w0.5: U1.4 73.497,60.599 ; 73.951,61.053 73.497,60.599 ; 73.959,61.053 R3.1@74.814,61.908 ; R4.2@75.482,58.963 75.232,59.213 74.883,59.213 73.497,60.599
NetR5_2: R5.2 U3.5 | length 10.3
  Top Layer w0.254: U3.5 56.682,42.98 57.241,43.538 v1(57.274,43.538) ; 55.761,36.365 v1(56.901,36.365)
  Bottom Layer w0.254: v1(56.901,36.365) v1@56.901,36.414
  Bottom Layer w0.4: v1@56.901,36.414 57.274,36.787 v1(57.274,43.538)
NetR6_2: R6.2 R7.1 U3.4 | length 6
  Top Layer w0.254: 58.085,42.483 58.094,42.483
  Top Layer w0.5: U3.4 57.632,42.03 ; 58.085,42.483 57.632,42.03 ; 58.094,42.483 58.111,42.5 R6.2@58.949,43.338 ; R7.1@59.161,40.501 59.161,40.526 58.724,40.963 58.699,40.963 57.632,42.03
NetR10_2: R10.2 R11.1 U5.1
Vin: F1.1 J1.1
pads on no net: MHNP1. MHNP2. MHNP3. MHNP4. U2.4 U2.5 U2.7 U2.9 U2.12 U4.2 U4.4 U4.5 U4.6 U4.7 U4.9 U4.10 U4.11 U4.12

## Polygon pours and split planes (outlines as drawn)
GND on Top Layer "Top Layer-GND 2" (solid, pour order 257): 42.251,27.021 42.251,32.228 52.868,32.228 54.417,33.778 54.417,34.788 57.836,34.788 57.836,37.948 59.279,39.391 60.234,39.391 60.97,40.128 60.97,44.827 60.259,45.538 58.379,45.538 54.214,49.704 54.214,55.916 57.633,55.916 61.91,51.639 61.91,34.387 54.544,27.021
GND on Top Layer "Top Layer-GND 1" (solid, pour order 254): 70.114,69.149 70.114,72.527 78.41,72.527 78.41,32.599 65.542,32.599 65.542,45.563 70.335,50.356 70.337,51.135 70.337,53.04 73.769,52.995 73.769,56.063 73.769,56.598 74.879,57.709 75.997,57.709 76.957,58.669 76.957,63.602 76.021,64.538 74.725,64.538
GND on Top Layer "Top Layer-GND 1" (solid, pour order 253): 56.373,23.44 65.532,32.599 78.41,32.599 78.41,1.84 1.6,1.84 1.6,98.128 78.41,98.131 78.41,72.527 64.831,72.527 60.132,72.527 59.269,73.391 59.269,74.871 58.12,76.02 54.522,76.02 54.522,76.3 58.128,76.3 58.996,77.167 58.996,83.747 55.469,87.274 33.234,87.274 33.234,90.445 32.798,90.881 29.005,90.881 29.005,86.948 27.805,86.948 ccw(c27.803,85.85) 26.705,85.849 26.705,85.848 26.705,77.652 cw(c23.02,77.65) 25.623,75.042 cw(c23.165,77.498) 23.164,74.023 16.239,74.023 ccw(c16.236,71.231) 14.26,73.203 12.89,71.833 ccw(c14.413,70.306) 12.402,71.086 12.171,70.492 ccw(c13.496,69.975) 12.074,69.974 12.074,69.05 cw(c11.277,69.047) 11.838,68.482 11.592,68.235 cw(c10.779,69.046) 10.778,67.898 7.08,67.898 7.08,61.198 ccw(c10.829,61.197) 10.83,57.448 11.78,57.448 cw(c11.782,54.776) 14.455,54.774 14.455,47.523 cw(c13.006,47.522) 13.005,46.073 5.338,46.073 ccw(c5.338,44.54) 3.805,44.539 3.805,24.065 ccw(c5.203,24.065) 5.203,22.667 cw(c5.203,21.538) 6.333,21.537 6.335,10.484 ccw(c8.437,10.484) 8.438,8.382 25.663,8.382 ccw(c25.663,17.028) 31.41,10.568 ccw(c27.306,14.672) 33.11,14.672 33.11,15.745 ccw(c32.476,15.745) 32.476,16.379 29.527,16.379 ccw(c29.527,14.687) 28.43,15.976 cw(c23.647,21.599) 23.646,14.217 20.744,14.217 cw(c20.744,16.606) 18.355,16.606 18.355,30.126 cw(c20.457,30.126) 20.457,32.228 26.452,32.228 26.452,27.123 30.135,23.44
NetC17_1 on Top Layer "Top Layer-NetC17_1" (solid, pour order 261): 39.069,48.383 54.05,48.383 54.05,54.875 44.293,54.875 42.005,57.163 42.005,59.323 41.205,60.123 37.82,60.123 37.82,59.834 38.53,59.834 38.544,59.848 39.005,59.848 39.005,59.623 38.995,59.614 37.82,59.614 37.82,59.334 38.995,59.334 38.995,57.848 37.52,57.848 37.52,59.034 37.506,59.048 37.24,59.048 37.24,57.848 37.005,57.848 37.005,58.309 37.02,58.324 37.02,59.048 36.74,59.048 36.74,53.905 36.74,50.712
GND on Top Layer "Top Layer-GND 3" (solid, pour order 260): 50.857,43.557 54.05,43.557 54.05,44.557 54.05,47.807 48.423,47.807 48.423,44.395 47.356,43.328 40.125,43.328 39.05,44.403 39.05,48.148 32.472,54.727 32.472,56.06 33.834,57.422 33.834,60.334 35.596,60.334 35.596,60.614 33.834,60.614 33.834,70.21 cw(c34.465,70.21) 34.465,70.84 35.723,70.84 ccw(c35.723,71.653) 36.536,71.653 36.536,77.039 ccw(c35.978,77.039) 35.977,77.597 32.061,77.597 30.795,78.863 30.795,90.496 31.252,90.953 29.005,90.953 29.005,86.944 cw(c29.005,86.119) 29.83,86.119 29.83,72.808 20.838,63.817 20.838,62.615 32.061,51.392 32.061,38.578 32.7,38.578 33.834,37.444 33.834,33.591 32.472,32.228 26.452,32.228 26.452,30.441 31.305,30.421 31.305,28.696 32.98,27.021 42.251,27.021 42.251,32.228 37.45,32.228 36.282,33.397 36.282,37.334 37.526,38.578 41.59,38.578 43.522,40.51 50.266,40.483 50.266,42.966
12to5Vin on Top Layer "Top Layer-12to3.3Vin" (solid, pour order 255): 54.229,33.894 54.229,42.294 53.09,42.294 52.928,42.132 51.117,40.321 43.637,40.321 41.671,38.354 37.607,38.354 36.485,37.232 36.485,33.498 37.577,32.406 52.741,32.406
12to3.3Vin on Top Layer "Top Layer-12to3.3Vin 1" (solid, pour order 263): 30.262,23.618 56.322,23.618 65.365,32.66 65.365,45.538 70.094,50.267 70.094,60.863 68.955,60.863 68.794,60.702 66.853,58.761 58.598,58.761 58.075,58.238 58.075,55.677 62.113,51.639 62.113,34.362 54.671,26.92 47.683,26.92 47.683,26.857 32.941,26.857 31.105,28.693 31.105,30.323 26.655,30.323 26.655,27.225
GND on Top Layer "Top Layer-GND" (solid, pour order 262): 44.367,55.044 57.852,55.042 57.852,58.269 58.515,58.932 66.133,58.901 66.133,61.511 66.797,62.175 69.917,62.175 69.917,63.101 69.917,63.102 69.917,66.352 64.196,66.352 64.196,62.47 63.444,61.718 56.424,61.718 55.509,62.632 55.509,66.391 53.223,68.677 50.571,68.677 48.622,70.627 48.622,73.34 50.301,75.02 51.656,75.02 51.656,75.3 50.33,75.3 50.059,75.57 50.059,75.748 50.331,76.02 51.301,76.02 51.301,76.3 51.67,76.02 51.67,76.3 51.666,76.304 50.29,76.304 50.059,76.535 50.059,76.789 50.29,77.02 51.684,77.02 51.684,77.3 50.01,77.3 49.058,78.252 49.058,82.123 48.53,82.651 35.389,82.651 34.199,83.841 34.199,86.447 35.026,87.274 33.234,87.274 33.234,81.758 34.119,80.873 39.772,80.873 42.28,78.366 42.28,61.482 41.412,60.614 37.171,60.614 37.171,60.334 41.404,60.334 42.28,59.458 42.28,57.132
Vin on Top Layer "VIN_L01_P250" (solid, pour order 250): 8.306,13.893 13.955,13.893 22.87,13.893 24.334,13.893 ccw(c24.334,19.977) 28.636,15.675 cw(c29.697,14.615) 29.697,16.114 31.648,16.114 cw(c31.648,15.19) 32.573,15.19 32.573,14.76 cw(c27.732,14.76) 31.155,11.336 cw(c25.322,17.169) 25.322,8.92 8.573,8.92 cw(c8.573,10.552) 6.941,10.585 6.981,12.594 cw(c8.306,12.568)
NetC7_2 on Top Layer "NETC7_2_L01_P231" (solid, pour order 231): 56.424,65.858 63.637,65.858 63.637,62.327 63.314,62.004 56.824,62.004 56.424,62.404
NetR2_2 on Top Layer "NETR2_2_L01_P232" (solid, pour order 232): 70.337,53.147 70.337,55.907 73.619,55.907 73.619,53.147
NetR5_2 on Top Layer "NETR5_2_L01_P233" (solid, pour order 233): 54.417,35.022 54.417,37.61 57.647,37.61 57.647,35.022
5Vout on Top Layer "5VOUT_L01_P235" (solid, pour order 235): 38.53,60.829 41.204,60.829 42.005,61.629 42.005,66.852 42.005,78.107 39.57,80.542 34.069,80.542 33.02,81.591 33.02,89.764 ccw(c32.255,89.764) 32.255,90.529 31.728,90.529 ccw(c31.728,89.876) 31.075,89.876 31.075,78.964 32.138,77.901 35.903,77.901 cw(c35.904,76.888) 36.917,76.888 36.917,71.551 ccw(c37.628,71.551) 37.628,70.84 38.237,70.84 cw(c38.237,70.148) 38.93,70.148 38.93,64.423 38.63,64.123 37.73,64.123 37.24,63.633 37.24,61.909 37.52,61.914 37.52,63.013 37.747,63.24 39.013,63.24 39.43,62.823 39.43,61.698 39.354,61.622 37.812,61.622 37.812,61.334 39.344,61.334 39.43,61.248 39.43,61.198 39.345,61.114 37.812,61.114 37.812,60.829
NetC21_2 on Top Layer "NETC21_2_L01_P236" (solid, pour order 236): 36.52,61.914 36.549,63.41 37.514,64.375 38.427,64.375 38.677,64.625 38.677,69.817 ccw(c37.995,69.817) 37.995,70.498 34.771,70.498 ccw(c34.771,69.85) 34.123,69.85 34.123,64.719 ccw(c34.582,64.719) 34.582,64.26 35.391,64.26 36.24,63.41 36.24,61.914
NetD1_1 on Top Layer "NETD1_1_L01_P238" (solid, pour order 238): 8.132,15.471 14.727,15.471 ccw(c14.727,18.648) 17.905,18.648 17.905,28.623 ccw(c16.48,28.623) 16.48,30.048 15.955,30.048 ccw(c15.955,28.648) 14.555,28.648 14.555,25.598 cw(c11.178,25.598) 11.177,22.221 8.127,22.221 ccw(c8.127,21.101) 7.007,21.101 7.007,16.595 ccw(c8.132,16.595)
NetD2_1 on Top Layer "NETD2_1_L01_P239" (solid, pour order 239): 4.392,25.073 4.392,28.226 cw(c6.456,28.226) 6.463,30.29 10.089,30.279 cw(c10.083,28.57) 11.792,28.57 11.792,26.998 11.792,24.135 cw(c10.505,24.135) 10.505,22.848 6.617,22.848 cw(c6.617,25.073)
NetD2_2 on Top Layer "NETD2_2_L01_P240" (solid, pour order 240): 13.055,27.323 13.48,27.323 ccw(c13.48,28.198) 14.355,28.198 14.355,29.028 cw(c15.825,29.028) 15.825,30.498 ccw(c15.825,31.053) 16.38,31.053 16.38,44.223 ccw(c14.755,44.223) 14.755,45.848 5.88,45.848 ccw(c5.88,43.998) 4.03,43.998 4.03,32.248 ccw(c5.78,32.248) 5.78,30.498 10.571,30.498 cw(c10.571,28.965) 12.105,28.965 12.105,28.273 ccw(c13.055,28.273)
NetF2_1 on Top Layer "NETF2_1_L01_P241" (solid, pour order 241): 18.355,34.255 18.355,43.673 cw(c20.555,43.673) 20.555,45.873 31.75,45.873 31.75,38.426 32.599,38.426 33.665,37.359 33.665,33.702 32.37,32.406 20.203,32.406 cw(c20.203,34.255)
12to12Vin on Top Layer "Top Layer-12to12Vin" (solid, pour order 242): 31.572,46.099 31.572,51.079 21.887,60.767 15.005,60.767 15.005,47.499 ccw(c16.404,47.498) 16.405,46.099
NetR10_2 on Top Layer "Top Layer-NetR10_2" (solid, pour order 243): 9.03,63.723 9.28,63.723 9.28,59.423 ccw(c10.58,59.423) 10.58,58.123 11.455,58.123 ccw(c11.455,58.798) 12.13,58.798 12.13,66.573 ccw(c11.28,66.573) 11.28,67.423 8.93,67.423 ccw(c8.93,65.823) 7.33,65.823 7.33,65.423 ccw(c9.03,65.423)
12Vout on Top Layer "Top Layer-12Vout" (solid, pour order 244): 13.579,58.123 ccw(c13.58,59.323) 14.78,59.323 14.78,61.219 15.454,61.893 20.584,64.018 29.652,73.086 29.652,85.445 ccw(c28.649,85.445) 28.649,86.448 28.268,86.448 ccw(c28.267,85.344) 27.163,85.344 27.163,76.3 cw(c25.308,76.3) 26.619,74.988 26.278,74.646 cw(c23.808,77.115) 23.808,73.623 16.841,73.623 ccw(c16.84,69.977) 14.261,72.554 13.364,71.658 ccw(c15.74,69.281) 12.38,69.281 12.38,59.323 ccw(c13.579,59.323)
NetC16_1 on Top Layer "NETC16_1_L01_P245" (solid, pour order 245): 55.049,43.938 55.049,44.713 55.049,46.275 56.324,46.275 56.324,44.713 56.299,43.913
NetC7_2 on Top Layer "NETC7_2_L01_P246" (solid, pour order 246): 66.482,60.118 66.482,61.565 66.812,61.896 70.114,61.896 70.114,61.286 68.915,61.286 68.558,60.936 67.437,59.838 66.762,59.838
NetC7_1 on Top Layer "NETC7_1_L01_P247" (solid, pour order 247): 70.953,62.547 70.953,63.322 70.953,64.664 72.228,64.664 72.228,63.322 72.203,62.522
NetC11_1 on Top Layer "NETC11_1_L01_P249" (solid, pour order 249): 53.236,77.6 53.265,79.096 54.231,80.061 55.084,80.061 55.309,80.287 55.309,82.47 53.604,82.47 52.956,81.822 52.956,79.096 52.956,77.6
3.3Vout on Top Layer "Top Layer-3.3Vout" (solid, pour order 251): 53.456,77.955 53.736,77.955 53.736,78.719 53.869,78.827 53.956,78.827 53.956,77.594 54.236,77.6 54.236,78.699 54.364,78.827 55.828,78.827 56.146,78.509 56.146,77.384 56.07,77.308 54.528,77.308 54.528,77.02 56.061,77.02 56.146,76.934 56.146,76.884 56.062,76.8 54.528,76.8 54.528,76.514 57.921,76.514 58.721,77.315 58.721,83.475 55.176,87.02 35.244,87.02 34.529,86.305 34.529,83.867 35.545,82.851 55.571,82.851 55.571,80.069 55.311,79.809 54.446,79.809 53.956,79.319 53.464,78.827
NetC8_1 on Top Layer "Top Layer-NetC8_1" (solid, pour order 252): 55.584,66.571 69.886,66.569 69.886,72.35 63.383,72.35 59.98,72.35 59.091,73.239 59.091,74.763 58.044,75.809 54.536,75.809 54.536,75.52 55.246,75.52 55.261,75.534 55.721,75.534 55.721,75.309 55.712,75.3 54.536,75.3 54.536,75.02 55.712,75.02 55.712,73.534 54.236,73.534 54.236,74.72 54.222,74.734 53.956,74.734 53.956,73.534 53.721,73.534 53.721,73.994 53.736,74.01 53.736,74.734 53.456,74.734 53.456,68.699
NetC16_2 on Top Layer "NETC16_2_L01_P258" (solid, pour order 258): 50.48,41.142 50.48,42.859 50.947,43.326 54.249,43.326 54.249,42.717 53.05,42.717 52.693,42.367 51.443,41.142
NetC16_2 on Top Layer "NETC16_2_L01_P259" (solid, pour order 259): 40.352,47.519 47.508,47.519 47.508,43.989 47.229,43.709 40.777,43.709 40.352,44.134
NetC16_2 on Bottom Layer "NETC16_2_L04_P256" (solid, pour order 256): 40.65,43.633 40.65,44.751 48.438,44.751 ccw(c58,63.753) 51.093,43.633 52.633,43.303 52.633,42.531 51.398,41.22 50.455,41.22 50.455,43.086 49.131,43.633
NetC7_2 on Bottom Layer "NETC7_2_L04_P248" (solid, pour order 248): 56.525,61.896 56.525,62.912 66.013,62.912 ccw(c77.691,83.1) 67.98,61.896 68.565,61.896 68.565,60.93 67.473,59.838 66.762,59.838 66.482,60.118 66.482,61.481 65.622,61.896
GND on Layer 2 (split plane): 79.49,0.51 0.51,0.51 0.51,99.49 79.49,99.49
GND on Layer 1 (split plane): 79.49,0.51 0.51,0.51 0.51,99.49 79.49,99.49

## Silkscreen, mask and mechanical layers (free items; w line width, h text height)
Top Overlay:
  drawing of 50 lines, arcs and shapes, not listed
  text "GND" at 25.75,97.5 h1.25 r180
  text "12V" at 30.5,97.5 h1.25 r180
  text "5V" at 34.25,97.5 h1.25 r180
  text "3.3V" at 40,97.5 h1.25 r180
  text "Vout" at 47,97.5 h1.52 r180
  text "Auxiliary Power Module" at 69.25,28.75 h1.52 r270
  text "+13V" at 27.379,1.778 h1.25
  text "Vin" at 22.25,1.75 h1.52
  text "GND" at 33.228,1.63 h1.25
Top Courtyard:
  the board outline again, w0.254

## Text inside footprints (layer, text, board x,y; h text height)
C1: Top Overlay "+" at 18.488,49.479 h1.2
C2: Top Overlay "+" at 48.982,35.948 h1.2 r90
C3: Top Overlay "+" at 65.913,51.344 h1.2 r135
C25: Top Overlay "+" at 48.575,86.854 h1.2 r90
C26: Top Overlay "+" at 40.586,76.149 h1.2
C27: Top Overlay "+" at 30.462,76.149 h1.2
Q1: Top 3D Body "TAB" at 12.794,30.709 h0.64